# Altium PCB SQUIDCtr_Rev1.PcbDoc (part 2 of 4)
Units mil, origin at the board's own origin, x right, y up, seen from the top; angles counter-clockwise.
Board outline 5863.43 x 2940 mil, 6 copper layers (Top Layer, Internal Plane 1, Mid-Layer 1, InternalPlane 2, Mid-Layer 2, Bottom Layer), stack 62.5 mil thick; 614 components, 341 nets, 1601 pads, 475 vias.
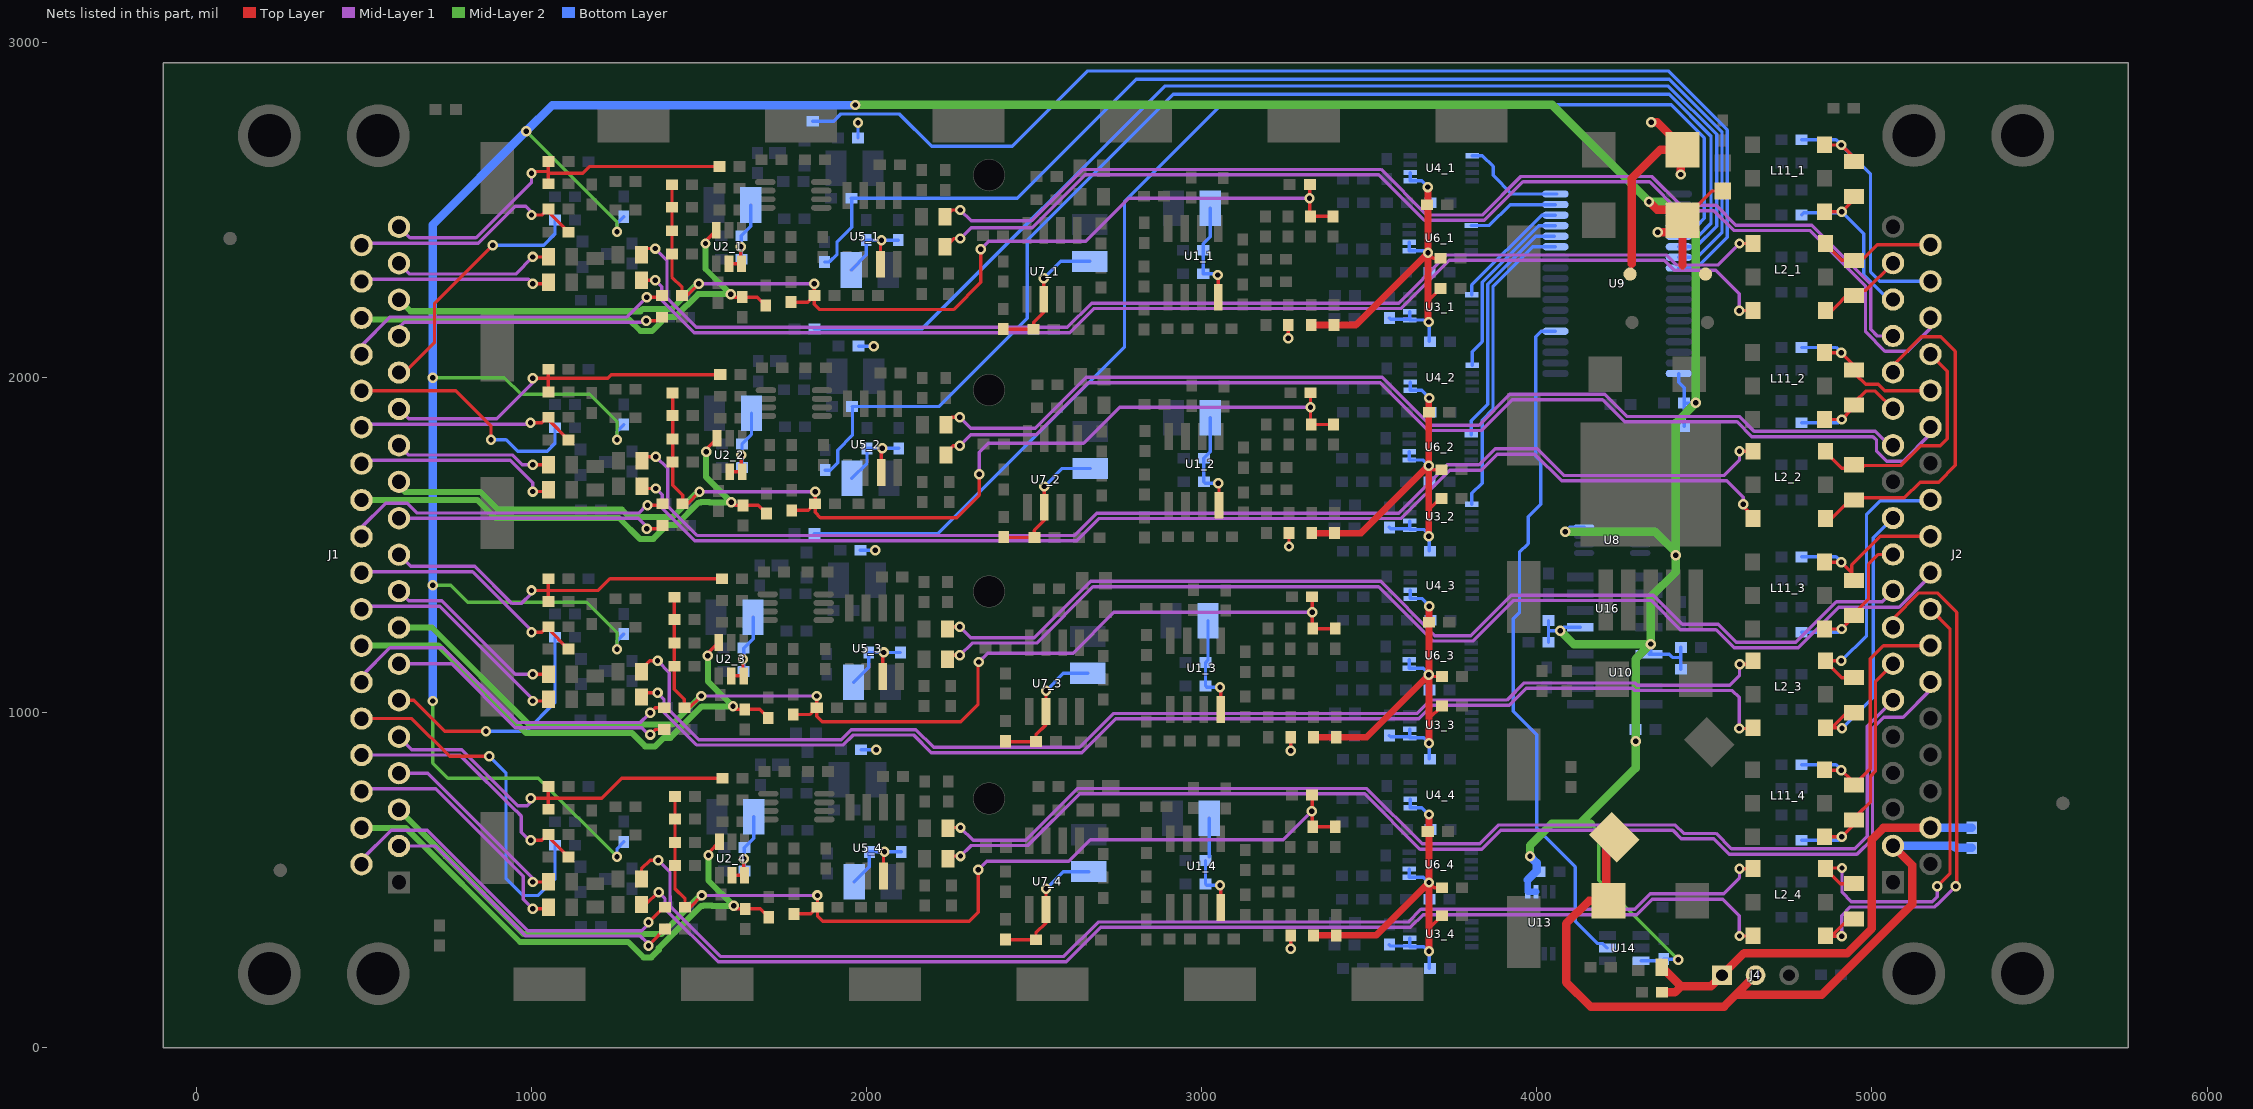
[diagram p6: the nets of this part, all layers, seen from the top]

## Components (designator, comment, footprint, x,y, rotation, side; value= is the part's Value field where it differs from the comment) (continued)
U6_4 "DAC8571IDGKR" MSOP-8 3619.5,509 r0 bottom (schematic designator U6)
U7_1 "REF43" SO8#1 2479,2234 r90 top (schematic designator U7)
U7_2 "REF43" SO8#1 2481,1613 r90 top (schematic designator U7)
U7_3 "REF43" SO8#1 2486,1004 r90 top (schematic designator U7)
U7_4 "REF43" SO8#1 2486,413 r90 top (schematic designator U7)
U8 "P82B96DP,118" MSOP8-P82B96 4225,1515 r180 bottom
U9 "MAX7300AAX+" SOP36Body15.4mmx7.5mm 4240,2280 r0 bottom
U10 "DS90C401M/NOPB" SO8#2 4335,1175 r180 bottom
U11_1 "ISL28118FUZ" MSOP8-P82B96 1782,2545 r180 top (schematic designator U11)
U11_2 "ISL28118FUZ" MSOP8-P82B96 1784,1924 r180 top (schematic designator U11)
U11_3 "ISL28118FUZ" MSOP8-P82B96 1789,1315 r180 top (schematic designator U11)
U11_4 "ISL28118FUZ" MSOP8-P82B96 1791,720 r180 top (schematic designator U11)
U12 "LT3080" D2-PAK-6_LT3080 4340,1555 r90 top
U13 "DAC8571IDGKR" MSOP-8 3973,466 r270 bottom
U14 "AD7414ARTZ-0500RL7" SOT23-6 4311,298 r270 bottom
U16 "DS90C402M/NOPB" SO8#2 4130,1255 r0 bottom

## Footprints (in the part's own frame and the unit in brackets; to place one, negate y for a bottom-side part, rotate by r counter-clockwise, add the part's x,y. Pads: shape width x height; smd on the part's side, far side on the other; paste and mask are expansions set on the pad)
0603 [mil]
  rect 36x32 smd: 1(0,0) 2(60,0)
  silkscreen extent -31,-30 90,30
0805 [mil]
  rect 38.5x52 smd: 1(0,0) 2(70,0)
  silkscreen extent -31,-38 101,38
0805L [mil]
  rect 50x50 smd: 1(-0.4,0.18) 2(83.6,0.18)
  silkscreen extent 31,-20 52,20
1206 [mil]
  rect 45x60 smd: 1(0,0) 2(105,0)
  silkscreen extent -37,-51 144,51
CC3225-1210 [mm]
  rect 1.6x2.7 smd: 1(-1.4,0) 2(1.4,0)
  silkscreen extent -0.3,-1.25 0.3,1.25
D2-PAK-6_LT3080 [mm] "D2-PAK, 6-Pads, Body 9.4x10.5mm (max), IPC Medium Density"
  rect 4.6x1.1 smd: 1(-5.55,3.404) 2(-5.55,1.702) 3(-5.55,0) 4(-5.55,-1.702) 5(-5.55,-3.404)
  rect 9.4x10.672 smd: 6(3.2,0)
  silkscreen extent -5.67,-5.25 -1.9,5.25, body extent -3.9,-5.28 5.5,5.27, height 4.57
"DSUB37-F (590MILS)" [mm] "DSUB 37Pin Female - 590mils from board edge to first pin"
  rect 1.69x1.69 hole 1.09: 1(-16.566,-10.92)
  round 1.69 hole 1.09: 2(-13.806,-10.92) 3(-11.046,-10.92) 4(-8.286,-10.92) 5(-5.526,-10.92) 6(-2.766,-10.92) 7(-0.006,-10.92) 8(2.754,-10.92) 9(5.514,-10.92) 10(8.274,-10.92) 11(11.034,-10.92) 12(13.794,-10.92) 13(16.554,-10.92) 14(19.314,-10.92) 15(22.074,-10.92) 16(24.834,-10.92) 17(27.594,-10.92) 18(30.354,-10.92) 19(33.114,-10.92) 20(-15.187,-8.08) 21(-12.427,-8.08) 22(-9.667,-8.08) 23(-6.907,-8.08) 24(-4.147,-8.08) 25(-1.387,-8.08) 26(1.373,-8.08) 27(4.133,-8.08) 28(6.893,-8.08) 29(9.653,-8.08) 30(12.413,-8.08) 31(15.173,-8.08) 32(17.933,-8.08) 33(20.693,-8.08) 34(23.453,-8.08) 35(26.213,-8.08) 36(28.973,-8.08) 37(31.733,-8.08)
  round 4.76 hole 3.26: 38(-23.476,-1.095) 38(-23.476,-9.348) 39(40.024,-1.095) 39(40.024,-9.348)
  silkscreen extent -26.5,-12.5 43.15,12.91
"DSUB37-M (590MILS)" [mm] "DSUB 37Pin Male - 590mils from board edge to first pin"
  rect 1.69x1.69 hole 1.09: 1(33.112,-10.92)
  round 1.69 hole 1.09: 2(30.352,-10.92) 3(27.592,-10.92) 4(24.832,-10.92) 5(22.072,-10.92) 6(19.312,-10.92) 7(16.552,-10.92) 8(13.792,-10.92) 9(11.032,-10.92) 10(8.272,-10.92) 11(5.512,-10.92) 12(2.752,-10.92) 13(-0.008,-10.92) 14(-2.768,-10.92) 15(-5.528,-10.92) 16(-8.288,-10.92) 17(-11.048,-10.92) 18(-13.808,-10.92) 19(-16.568,-10.92) 20(31.733,-8.08) 21(28.973,-8.08) 22(26.213,-8.08) 23(23.453,-8.08) 24(20.693,-8.08) 25(17.933,-8.08) 26(15.173,-8.08) 27(12.413,-8.08) 28(9.653,-8.08) 29(6.893,-8.08) 30(4.133,-8.08) 31(1.373,-8.08) 32(-1.387,-8.08) 33(-4.147,-8.08) 34(-6.907,-8.08) 35(-9.667,-8.08) 36(-12.427,-8.08) 37(-15.187,-8.08)
  round 4.76 hole 3.26: 38(40.024,-9.348) 38(40.024,-1.095) 39(-23.476,-9.348) 39(-23.476,-1.095)
  silkscreen extent -26.5,-12.5 43.15,12.91
ELLATV [mm] "Inductor"
  rect 2.45x3 smd rot 45: 1(-3.6,-3.6) 2(3.6,3.6)
  silkscreen extent -5.5,-5.5 5.5,5.5
Fiducial_mark [mil]
  round 40 smd mask+20: 0(0,0)
  round 40 smd far side mask+20: 1(0,0)
HDR1X3_MolexVertical [mm] "WM2889"
  rect 1.5x1.5 hole 0.889: 1(0,0)
  round 1.5 hole 0.889: 2(2.54,0) 3(5.08,0)
  silkscreen extent -2.54,-3.02 7.62,1.73
MSOP8-P82B96 [mm] "TSOP, 8-Leads, Body 3.1x3.1mm (max), Pitch 0.65mm, IPC Medium Density"
  oval 1.55x0.45 smd: 1(-2.125,0.975) 2(-2.125,0.325) 3(-2.125,-0.325) 4(-2.125,-0.975) 5(2.125,-0.975) 6(2.125,-0.325) 7(2.125,0.325) 8(2.125,0.975)
  silkscreen extent -2.25,-1.55 0.95,1.87, body extent -1.55,-1.55 1.55,1.55, height 1.1
MSOP-8 [mil]
  rect 40x16 smd: 1(0,0) 2(0,-25) 3(0,-50) 4(0,-75) 5(185,-75) 6(185,-50) 7(185,-25) 8(185,0)
  silkscreen extent -3,-100 150,26
"SHIELD BASE" [mil]
  rect 215x100 smd: 1(500,25)
  silkscreen extent 120,-12 380,13
"SHIELD BASE CORNER" [mil]
  rect 100x215 smd: 1(156,-381)
  silkscreen extent 118,-260 144,13
SO8#1 [mil]
  round 10 on Top Overlay: 0(-40,40)
  rect 80x26 smd: 1(0,0) 2(0,-50) 3(0,-100) 4(0,-150) 5(205,-150) 6(205,-100) 7(205,-50) 8(205,0)
  silkscreen extent -53,-180 258,30
SO8#2 [mil]
  round 10 on Bottom Overlay: 0(-40,40)
  rect 80x26 smd: 1(0,0) 2(0,-50) 3(0,-100) 4(0,-150) 5(205,-150) 6(205,-100) 7(205,-50) 8(205,0)
  silkscreen extent -53,-180 258,30
SOP36Body15.4mmx7.5mm [mm] "SOP, 36-Leads, Body 15.38x7.50mm, Pitch 0.80mm, IPC Medium Density"
  oval 2x0.55 smd: 1(-4.675,6.8) 2(-4.675,6) 3(-4.675,5.2) 4(-4.675,4.4) 5(-4.675,3.6) 6(-4.675,2.8) 7(-4.675,2) 8(-4.675,1.2) 9(-4.675,0.4) 10(-4.675,-0.4) 11(-4.675,-1.2) 12(-4.675,-2) 13(-4.675,-2.8) 14(-4.675,-3.6) 15(-4.675,-4.4) 16(-4.675,-5.2) 17(-4.675,-6) 18(-4.675,-6.8) 19(4.675,-6.8) 20(4.675,-6) 21(4.675,-5.2) 22(4.675,-4.4) 23(4.675,-3.6) 24(4.675,-2.8) 25(4.675,-2) 26(4.675,-1.2) 27(4.675,-0.4) 28(4.675,0.4) 29(4.675,1.2) 30(4.675,2) 31(4.675,2.8) 32(4.675,3.6) 33(4.675,4.4) 34(4.675,5.2) 35(4.675,6) 36(4.675,6.8)
  silkscreen extent -4.8,-7.8 3.27,7.8, body extent -3.8,-7.8 3.8,7.8, height 2.65
SOT23 [mil]
  rect 36x36 smd: 1(-38,-80) 2(37,-80)
  rect 36x50 smd: 3(0,0)
  silkscreen extent -58,-85 57,5
SOT23-6 [mil]
  rect 26x50 smd: 1(-37.5,0) 2(0,0) 3(37.5,0) 4(37.5,100) 5(0,100) 6(-37.5,100)
  silkscreen extent -83,-8 65,100
SRR4028 [mm]
  round 1 smd: 1(-2.02,1.912) 2(-1.87,-1.749)
  Top Layer region: 1.8,-0.751 2.651,-0.751 2.65,-2.751 -2.649,-2.752 -2.648,-0.752 -1.8,-0.752 -1.636,-0.751 -1.558,-0.901 -1.474,-1.033 -1.378,-1.158 -1.273,-1.273 -1.157,-1.38 -1.032,-1.476 -0.901,-1.56 -0.76,-1.633 -0.616,-1.692 -0.465,-1.74 -0.312,-1.774 -0.157,-1.794 0.001,-1.801 0.157,-1.795 0.313,-1.773 0.466,-1.739 0.617,-1.692 0.761,-1.632 0.901,-1.56 1.033,-1.476 1.158,-1.38 1.273,-1.274 1.38,-1.158 1.475,-1.034 1.559,-0.901 1.632,-0.763 1.636,-0.751 1.801,-0.751
  Top Layer region: -1.8,0.75 -2.65,0.75 -2.65,2.75 2.65,2.75 2.649,0.751 1.8,0.751 1.637,0.75 1.559,0.9 1.475,1.032 1.378,1.157 1.273,1.272 1.158,1.379 1.033,1.475 0.901,1.559 0.761,1.631 0.616,1.691 0.466,1.739 0.313,1.773 0.157,1.793 0,1.8 -0.156,1.793 -0.312,1.772 -0.466,1.738 -0.616,1.691 -0.761,1.631 -0.9,1.559 -1.033,1.474 -1.157,1.379 -1.273,1.273 -1.379,1.157 -1.475,1.033 -1.559,0.9 -1.631,0.762 -1.636,0.75 -1.8,0.75
TCASE-D [mm]
  rect 2.55x2.7 smd: 1(0,0) 2(6.35,0)
  silkscreen extent -1.9,-2.54 8.26,2.54
TTWB [mil] "Transformer"
  round 10 on Top Overlay: 1(-44,-3)
  rect 50x44.88 smd: 1(0,0) 2(100,0) 3(200,0) 4(200,215) 5(100,215) 6(0,215)
  silkscreen extent -35,-33 235,248

## Part data
C1 C2 C3_1 C3_2 C3_3 C3_4 C4 C5_1 C5_2 C5_3 C5_4 C6_1 C6_2 C6_3 C6_4 C7_1 C7_2 C7_3 C7_4 C8_1 C8_2 C8_3 C8_4 C9_1 C9_2 C9_3 C9_4 C10 C11_1 C11_2 C11_3 C11_4 C12_1 C12_2 C12_3 C12_4 C13_1 C13_2 C13_3 C13_4 C14_1 C14_2 C14_3 C14_4 C15_1 C15_2 C15_3 C15_4 C16_1 C16_2 C16_3 C16_4 C17_1 C17_2 C17_3 C17_4 C18_1 C18_2 C18_3 C18_4 C19_1 C19_2 C19_3 C19_4 C20_1 C20_2 C20_3 C20_4 C21_1 C21_2 C21_3 C21_4 C22 C23_1 C23_2 C23_3 C23_4 C26_1 C26_2 C26_3 C26_4 C30 C31 C32 C35_1 C35_2 C35_3 C35_4 C36_1 C36_2 C36_3 C36_4 C37_1 C37_2 C37_3 C37_4 C39_1 C39_2 C39_3 C39_4 C40_1 C40_2 C40_3 C40_4 C41_1 C41_2 C41_3 C41_4 C42_1 C42_2 C42_3 C42_4 C43_1 C43_2 C43_3 C43_4 C44 C45_1 C45_2 C45_3 C45_4 C46_1 C46_2 C46_3 C46_4 C47_1 C47_2 C47_3 C47_4 C48_1 C48_2 C48_3 C48_4 C49_1 C49_2 C49_3 C49_4 C50_1 C50_2 C50_3 C50_4 C51_1 C51_2 C51_3 C51_4 C52_1 C52_2 C52_3 C52_4 C53_1 C53_2 C53_3 C53_4 C54_1 C54_2 C54_3 C54_4 C55 C56 C57 C58_1 C58_2 C58_3 C58_4 C59_1 C59_2 C59_3 C59_4 C60_1 C60_2 C60_3 C60_4 C61_1 C61_2 C61_3 C61_4 C62_1 C62_2 C62_3 C62_4 C67_1 C67_2 C67_3 C67_4 C68_1 C68_2 C68_3 C68_4 C69_1 C69_2 C69_3 C69_4: library part Cap0603, "Capacitor, Ceramic, 0603"
C24 C25 C27 C28 C29: library part Tantalum, "CAP TANT CASE-D"
C38_1 C38_2 C38_3 C38_4 C63_1 C63_2 C63_3 C63_4 C64_1 C64_2 C64_3 C64_4 C65_1 C65_2 C65_3 C65_4 C66_1 C66_2 C66_3 C66_4: library part "CAP 1210", "Capacitor, Ceramic, 1210"
DP1: library part "LED, yellow, 0805, 2mA", "LED"
J1: "DB37F"
J2: "DB37M"
J4: library part "Header 3", "3-Pin 0.1\" header"
L1_1 L1_2 L1_3 L1_4 L9_1 L9_2 L9_3 L9_4: library part Inductor0603, "Inductor 0603"
L3: "33uH 1.8A inductor 10mmx10mm"
L4 L7_1 L7_2 L7_3 L7_4 L8_1 L8_2 L8_3 L8_4: library part Inductor0603, "Inductor 0805"
L5 L6: library part InductorSRR4028, "=PartConstraints"
L11_1 L11_2 L11_3 L11_4: library part Transformer, "Transformer"
Q1_1 Q1_2 Q1_3 Q1_4: library part 2N2222, "TRANS NPN 40V 350MW SMD SOT23-3"
Q2_1 Q2_2 Q2_3 Q2_4: library part BC849_850, "TRANSISTOR NPN 30V 100MA SOT23"
R1_1 R1_2 R1_3 R1_4 R2_1 R2_2 R2_3 R2_4 R3_1 R3_2 R3_3 R3_4 R5_1 R5_2 R5_3 R5_4 R10_1 R10_2 R10_3 R10_4 R55_1 R55_2 R55_3 R55_4 R57_1 R57_2 R57_3 R57_4: library part "RES 0805", "RES 0805 SMD"
R4_1 R4_2 R4_3 R4_4 R35_1 R35_2 R35_3 R35_4: library part "RES 1206", "RES 100 OHM 1/4W 1206 SMD"
R6_1 R6_2 R6_3 R6_4 R7_1 R7_2 R7_3 R7_4 R9_1 R9_2 R9_3 R9_4 R16 R17 R18 R42 R43_1 R43_2 R43_3 R43_4 R46_1 R46_2 R46_3 R46_4 R47_1 R47_2 R47_3 R47_4 R50_1 R50_2 R50_3 R50_4 R64_1 R64_2 R64_3 R64_4 R65_1 R65_2 R65_3 R65_4 R66 R68 R73 R75 R76: library part "RES 0603", "RES 0603"
R8_1 R8_2 R8_3 R8_4 R11_1 R11_2 R11_3 R11_4 R12_1 R12_2 R12_3 R12_4 R13_1 R13_2 R13_3 R13_4 R14_1 R14_2 R14_3 R14_4 R15 R19_1 R19_2 R19_3 R19_4 R20_1 R20_2 R20_3 R20_4 R21_1 R21_2 R21_3 R21_4 R22_1 R22_2 R22_3 R22_4 R23_1 R23_2 R23_3 R23_4 R24_1 R24_2 R24_3 R24_4 R25_1 R25_2 R25_3 R25_4 R26_1 R26_2 R26_3 R26_4 R27_1 R27_2 R27_3 R27_4 R28_1 R28_2 R28_3 R28_4 R29_1 R29_2 R29_3 R29_4 R30_1 R30_2 R30_3 R30_4 R31_1 R31_2 R31_3 R31_4 R32 R33_1 R33_2 R33_3 R33_4 R34_1 R34_2 R34_3 R34_4 R36_1 R36_2 R36_3 R36_4 R37_1 R37_2 R37_3 R37_4 R38_1 R38_2 R38_3 R38_4 R39_1 R39_2 R39_3 R39_4 R40_1 R40_2 R40_3 R40_4 R41_1 R41_2 R41_3 R41_4 R44_1 R44_2 R44_3 R44_4 R45_1 R45_2 R45_3 R45_4 R48_1 R48_2 R48_3 R48_4 R49_1 R49_2 R49_3 R49_4 R51_1 R51_2 R51_3 R51_4 R52_1 R52_2 R52_3 R52_4 R53_1 R53_2 R53_3 R53_4 R54_1 R54_2 R54_3 R54_4 R56_1 R56_2 R56_3 R56_4 R58_1 R58_2 R58_3 R58_4 R59_1 R59_2 R59_3 R59_4 R60_1 R60_2 R60_3 R60_4 R61_1 R61_2 R61_3 R61_4 R62_1 R62_2 R62_3 R62_4 R63_1 R63_2 R63_3 R63_4 R67 R69_1 R69_2 R69_3 R69_4 R70_1 R70_2 R70_3 R70_4 R71_1 R71_2 R71_3 R71_4 R72_1 R72_2 R72_3 R72_4 R74_1 R74_2 R74_3 R74_4 R77_1 R77_2 R77_3 R77_4 R78_1 R78_2 R78_3 R78_4 R79_1 R79_2 R79_3 R79_4 R80_1 R80_2 R80_3 R80_4 R81_1 R81_2 R81_3 R81_4 R82_1 R82_2 R82_3 R82_4 R85: library part Res0603, "RES 0603"
SH1 SH2 SH3 SH4 SH5 SH6 SH8 SH9 SH10 SH11 SH12 SH13 SH14 SH16 SH17 SH18 SH19 SH20 SH21 SH22 SH23 SH24: library part ShieldBase
U1_1 U1_2 U1_3 U1_4: library part LMH6628, "IC OP AMP DUAL 2CH LN 8-SOIC"
U2_1 U2_2 U2_3 U2_4: "IC OPAMP R-R I/O 800MHZ SOT-23-6"
U3_1 U3_2 U3_3 U3_4 U4_1 U4_2 U4_3 U4_4 U6_1 U6_2 U6_3 U6_4 U13: "IC DAC 16BIT I2C V-OUT LP 8-MSOP"
U5_1 U5_2 U5_3 U5_4: "IC AMP DIFF LDIST LP 95MA 8SOIC"
U7_1 U7_2 U7_3 U7_4: "Voltage Referance"
U8: library part P82B96, "IC DUAL BI-DIR BUS BUFFER 8-TSSOP"
U9: "IO expander 28 IOs, I2C"
U10: "IC DRV LVDS DUAL DIFF SGNL 8SOIC"
U11_1 U11_2 U11_3 U11_4: "IC OPAMP PREC R-R 4MHZ LP 8MSOP"
U12: "Low dropout regulator, single resistor, 1.1A"
U14: "Digital Temperature Sensor, 11-Bit, +/-2 Degree Accurate"
U16: "IC REC LVDS DUAL DIFF SGNL 8SOIC"

## Free pads (board coordinates)
  round 96 hole 93 unplated: 1(2366,744) 1(2366,1362) 1(2366,1963) 1(2366,2604)

## Via types
v1: diameter 31, hole 16, Top Layer to Bottom Layer, tented both sides, 475 vias

## Nets (pads, with @x,y where several pads share a name; then routed paths per layer and width w, separated by ;. In a path a pad name is that pad's centre, name@x,y a point inside that pad or via, vN(x,y) a via of type N, cw(c..) or ccw(c..) an arc to the next point about the centre after c; other vN are vias at no path point)
5V5_RAW: C24.1 J2.2 J4.2 L3.1 R18.1 | length 2237.8
  Top Layer w25: L3.1@4231.27,628.27 4207,604 4207,446 C24.1@4214,439 4156,439 4088,371 4088,196 4161,123 4559,123 4595,159 ; J4.2@4653,217 4595,159 ; J2.2@5063.08,602.87 5120,545.95 5120,428 4851,159 4595,159
  Bottom Layer w25: J2.2@5063.08,602.87 5244.13,602.87 5250,597 R18.1@5298,597
5VA: C5_1.2 C5_2.2 C5_3.2 C5_4.2 C6_1.2 C6_2.2 C6_3.2 C6_4.2 C18_1.2 C18_2.2 C18_3.2 C18_4.2 C20_1.2 C20_2.2 C20_3.2 C20_4.2 C21_1.2 C21_2.2 C21_3.2 C21_4.2 C27.1 C39_1.2 C39_2.2 C39_3.2 C39_4.2 C41_1.2 C41_2.2 C41_3.2 C41_4.2 C42_1.2 C42_2.2 C42_3.2 C42_4.2 C63_1.2 C63_2.2 C63_3.2 C63_4.2 C64_1.2 C64_2.2 C64_3.2 C64_4.2 C65_1.2 C65_2.2 C65_3.2 C65_4.2 C66_1.2 C66_2.2 C66_3.2 C66_4.2 L5.2 R12_1.1 R12_2.1 R12_3.1 R12_4.1 R61_1.2 R61_2.2 R61_3.2 R61_4.2 U1_1.8 U1_2.8 U1_3.8 U1_4.8 U2_1.5 U2_1.6 U2_2.5 U2_2.6 U2_3.5 U2_3.6 U2_4.5 U2_4.6 U5_1.3 U5_2.3 U5_3.3 U5_4.3 U7_1.2 U7_2.2 U7_3.2 U7_4.2 | length 5957.2
  Top Layer w10: U2_1.5@1590,2340 U2_1.6@1627.5,2340 1625,2342.5 v1(1625,2390) ; U2_2.5@1592,1719 U2_2.6@1629.5,1719 1627,1721.5 v1(1627,1769) ; U2_3.5@1597,1110 U2_3.6@1634.5,1110 1632,1112.5 v1(1632,1160) ; U2_4.5@1599,515 U2_4.6@1636.5,515 1634,517.5 v1(1634,565) ; U5_1.3@2042,2338 v1@2042,2407 ; U5_2.3@2044,1717 v1@2044,1786 ; U5_3.3@2049,1108 v1@2049,1177 ; U5_4.3@2051,513 v1@2051,582 ; C21_1.2@2408,2145 2409,2144 C18_1.2@2499,2144 2499,2165 2529,2195 U7_1.2@2529,2234 v1(2529,2296) ; C21_2.2@2410,1524 2411,1523 C18_2.2@2501,1523 2501,1544 2531,1574 U7_2.2@2531,1613 v1(2531,1675) ; C21_4.2@2415,324 2416,323 C18_4.2@2506,323 2506,344 2536,374 U7_4.2@2536,413 v1(2536,475) ; C21_3.2@2415,915 2416,914 C18_3.2@2506,914 2506,935 2536,965 U7_3.2@2536,1004 v1(2536,1066) ; v1(3048,2306) 3050,2304 U1_1.8@3050,2240 ; v1(3050,1685) 3052,1683 U1_2.8@3052,1619 ; v1(3055,485) 3057,483 U1_4.8@3057,419 ; v1(3055,1076) 3057,1074 U1_3.8@3057,1010 ; v1(3259,2117) R12_1.1@3259,2157 ; v1(3261,1496) R12_2.1@3261,1536 ; v1(3266,296) R12_4.1@3266,336 ; v1(3266,887) R12_3.1@3266,927
  Top Layer w25: 4283,2339 4283,2594 4369,2680 C27.1@4435,2680 ; v1(4342,2761.63) 4360,2761.63 4375,2746.63 ; 4365,2756.63 C27.1@4426.63,2695 ; v1(4430,2605.99) C27.1@4430,2650.99
  Bottom Layer w10: C5_1.2@1627,2353 C6_1.2@1627,2423 1655.12,2451.12 C63_1.2@1655.12,2515 ; C5_2.2@1629,1732 C6_2.2@1629,1802 1657.12,1830.12 C63_2.2@1657.12,1894 ; C5_3.2@1634,1123 C6_3.2@1634,1193 1662.12,1221.12 C63_3.2@1662.12,1285 ; C5_4.2@1636,528 C6_4.2@1636,598 1664.12,626.12 C63_4.2@1664.12,690 ; C64_1.2@1954.88,2321 2000,2366.12 C42_1.2@2000,2410 v1(2045,2410) C41_1.2@2095,2410 ; C64_2.2@1956.88,1700 2002,1745.12 C42_2.2@2002,1789 v1(2047,1789) C41_2.2@2097,1789 ; C64_3.2@1961.88,1091 2007,1136.12 C42_3.2@2007,1180 v1(2052,1180) C41_3.2@2102,1180 ; C64_4.2@1963.88,496 2009,541.12 C42_4.2@2009,585 v1(2054,585) C41_4.2@2104,585 ; R61_1.2@1975,2715 v1(1975,2760) ; R61_2.2@1977,2094 v1(2022,2094) ; R61_3.2@1982,1485 v1(2027,1485) ; R61_4.2@1984,890 v1(2029,890) ; v1(2529,2296) 2579.88,2346.88 C66_1.2@2666,2346.88 ; v1(2531,1675) 2584.88,1728.88 C66_2.2@2668,1728.88 ; v1(2536,475) 2586.88,525.88 C66_4.2@2664,525.88 ; v1(2536,1066) 2587.88,1117.88 C66_3.2@2661,1117.88 ; C39_4.2@3012,559 C20_4.2@3012,489 3016,485 v1(3055,485) ; C65_3.2@3019.12,1275 3019.12,1157.12 C39_3.2@3012,1150 C20_3.2@3012,1080 3016,1076 v1(3055,1076) ; C39_4.2@3023.12,570.12 C65_4.2@3023.12,685 ; C65_2.2@3026.12,1880 3026.12,1778.12 C39_2.2@3007,1759 C20_2.2@3007,1689 3011,1685 v1(3050,1685) ; C65_1.2@3026.12,2505 3026.12,2420.12 3005,2399 C39_1.2@3005,2380 C20_1.2@3005,2310 3044,2310 v1(3048,2306)
5VD: C1.2 C2.2 C10.2 C22.2 C29.1 C30.2 C31.2 C32.2 C44.2 DP1.1 L6.2 R63_1.1 R63_2.1 R63_3.1 R63_4.1 R67.2 U8.8 U9.36 U10.1 U13.1 U13.2 U14.3 U16.1 | length 13002.6
  Top Layer w10: C29.1@4435,2470 4521.6,2556.6 DP1.1@4554.82,2556.6
  Top Layer w25: v1(4335,2525) 4359,2501 4404,2501 C29.1@4435,2470 ; v1(4361,2434) 4399,2434 C29.1@4435,2470 ; 4435,2335 C29.1@4435,2470
  Mid-Layer 2 w10: v1(706.57,1035) 706.57,850 751.57,805 1021,805 v1(1256,570) ; v1(706.57,1380) 760,1380 810,1330 1165,1330 1256,1239 v1(1256,1190) ; v1(706.57,2000) 920,2000 970,1950 1175,1950 1256,1869 v1(1256,1815) ; v1(985,2735) 1256,2464 v1(1256,2435) ; 4161,669 4185,645 4185,500 v1(4422,263)
  Mid-Layer 2 w25: v1@1973,2814 4046,2814 v1(4335,2525) 4385,2525 4475,2435 v1(4475,1925) 4415,1865 v1@4415,1478.08 ; v1(3980,572) 3980,604 4045,669 4161,669 ; v1(4070,1245) 4110,1205 v1(4340,1205) ; v1(4085,1540) 4353.08,1540 v1@4415,1478.08 ; 4129,669 4295,835 4295,1160 v1(4340,1205) ; v1(4340,1205) 4340,1345.25 4415,1420.25 v1(4415,1470) v1@4415,1478.08
  Bottom Layer w10: v1(1256,570) 1256,595 R63_4.1@1276,615 ; v1(1256,1190) 1256,1215 R63_3.1@1276,1235 ; v1(1256,1815) 1256,1840 R63_2.1@1276,1860 ; v1(1256,2435) 1256,2460 R63_1.1@1276,2480 ; C44.2@4035,1210 4035,1245 ; C10.2@4035,1275 4035,1245 ; v1(4085,1540) 4098.39,1553.39 U8.8@4141.34,1553.39 ; U16.1@4130,1255 4080,1255 v1(4070,1245) 4035,1245 ; v1(4295,915) R67.2@4295,950 ; U14.3@4311,260.5 4374.5,260.5 C30.2@4379,265 4410,265 4412,263 v1(4422,263) ; v1(4340,1205) 4340,1180 U10.1@4335,1175 4395,1175 4405,1165 4430,1165 ; U9.36@4424.06,2012.28 4424.06,1985.94 4440,1970 C32.2@4440,1924 ; C2.2@4430,1130 4430,1165 ; C1.2@4430,1195 4430,1165 ; C31.2@4440,1854 C32.2@4440,1924 ; v1(4475,1925) 4474,1924 C32.2@4440,1924
  Bottom Layer w20: 3973,501 U13.1@3973,466 U13.2@3998,466
  Bottom Layer w25: v1(706.57,1035) v1(706.57,1380) v1(706.57,2000) 706.57,2456.57 v1(985,2735) 1063.04,2813.04 v1@1961.04,2813.04 ; 3973,501 4000,528 4000,552 v1(3980,572)
  other v1: 1967,2813.5
6V5_RAW: C4.2 J2.21 J4.1 L4.2 R18.2 | length 1372.2
  Top Layer w25: L4.2@4373,241 4430,184 ; C4.2@4374,166 4412,166 4430,184 ; J2.21@5168.89,653 J2.21@5172.53,656.64 ; J2.21@5174.89,656.64 J2.21@5172.53,656.64 ; J2.21@5174.89,659 J2.21@5172.53,656.64 ; 4430,184 4520,184 4619,283 4926.7,283 5000,356.3 5000,622.36 5034.28,656.64 J2.21@5172.53,656.64
  Bottom Layer w25: J2.21@5174.89,657.17 5175.05,657 R18.2@5298,657
ALERT: U9.5 U14.5 | length 2055.7
  Bottom Layer w10: U9.5@4055.94,2138.27 4013.27,2138.27 3997.5,2122.5 3997.5,1765.13 4012.5,1750.13 4012.5,1622.13 3975,1584.63 3975,1505 3948.5,1478.5 3948.5,1298.5 3930,1280 3930,1005 4000,935 4000,655 4115,540 4115,377.94 4181.44,311.5 4197.5,311.5 U14.5@4211,298
CARRIER_1_N: L2_1.3 R10_1.1 | length 3595.9
  Top Layer w10: R10_1.1@1321,2290 v1(1370,2290) ; v1(4604,2200) L2_1.3@4649,2200
  Mid-Layer 1 w10: v1(1370,2290) 1389,2271 1389,2231 1486,2134 2606.63,2134 2678.63,2206 3594.63,2206 3738.63,2350 4380.37,2350 4410.37,2320 4534,2320 4604,2250 v1@4604,2201
CARRIER_1_P: L2_1.1@4646,2400 R2_1.1 | length 3625.1
  Top Layer w10: R2_1.1@1321,2360 1346,2385 v1@1364,2385 ; v1(4605,2400) L2_1.1@4650,2400
  Mid-Layer 1 w10: v1(1370,2385) 1405,2350 1405,2237.63 1492.63,2150 2600,2150 2672,2222 3588,2222 3732,2366 4387,2366 4417,2336 4540.63,2336 4540.81,2335.81 v1(4605,2400)
CARRIER_2_N: L2_2.3 R10_2.1 | length 3621
  Top Layer w10: R10_2.1@1323,1669 v1(1372,1669) ; v1(4616,1622) 4616,1616 L2_2.3@4652,1580
  Mid-Layer 1 w10: v1(1372,1669) 1391,1650 1391,1610 1488,1513 2627.63,1513 2694.31,1579.69 3595.69,1579.69 3740,1724 3834.63,1724 3882.31,1771.69 3994.31,1771.69 4074,1692 4566.63,1692 4566.81,1692.19 4616,1643 v1(4616,1622) v1@4617,1621
CARRIER_2_P: L2_2.1@4646,1780 R2_2.1 | length 3682.3
  Top Layer w10: R2_2.1@1323,1739 1348,1764 v1@1366,1764 ; v1(4605,1780) L2_2.1@4646,1780 L2_2.1@4652,1780
  Mid-Layer 1 w10: v1(1372,1764) 1407,1729 1407,1616.63 1494.63,1529 2621,1529 2687.69,1595.69 3589.06,1595.69 3733.37,1740 3828,1740 3875.69,1787.69 4000.94,1787.69 4080.63,1708 4560,1708 4605,1753 v1(4605,1780)
CARRIER_3_N: L2_3.3 R10_3.1 | length 3627.7
  Top Layer w10: R10_3.1@1328,1060 v1(1377,1060) ; v1(4604,953) 4650,953 L2_3.3@4652,955
  Mid-Layer 1 w10: v1(1377,1060) 1396,1041 1396,1001 1493,904 1931.63,904 1961.31,933.69 2141.31,933.69 2194,881 2642.63,881 2743.31,981.69 3648.69,981.69 3689,1022 3918,1022 3969,1073 4286,1073 4292.69,1066.31 4583.69,1066.31 4604,1046 v1@4604,956
CARRIER_3_P: L2_3.1@4646,1155 R2_3.1 | length 3667.1
  Top Layer w10: R2_3.1@1328,1130 1353,1155 v1@1371,1155 ; v1(4606,1145) 4642,1145 L2_3.1@4652,1155
  Mid-Layer 1 w10: v1(1377,1155) 1412,1120 1412,1007.63 1499.63,920 1925,920 1954.69,949.69 2147.94,949.69 2200.63,897 2636,897 2736.69,997.69 3642.06,997.69 3682.37,1038 3911.37,1038 3962.37,1089 4292.63,1089 4299.31,1082.31 4576.6,1082.31 4605,1110.72 v1@4605,1155
CARRIER_4_N: L2_4.3 R10_4.1 | length 3597.2
  Top Layer w10: R10_4.1@1329,428 1342,428 v1@1379,465 ; v1(4605,334) 4651,334 L2_4.3@4652,335
  Mid-Layer 1 w10: v1(1380,465) 1399,446 1399,416 1558,257 2596,257 2698.69,359.69 3623.31,359.69 3661.31,397.69 4298.69,397.69 4345,444 4555,444 4604,395 v1@4604,336
CARRIER_4_P: L2_4.1@4646,535 R2_4.1 | length 3656.3
  Top Layer w10: R2_4.1@1329,504 1329,534 1355,560 v1@1373,560 ; v1(4605,535) L2_4.1@4652,535
  Mid-Layer 1 w10: v1(1379,560) 1414,525 1414,453.63 1415,452.63 1415,422.63 1564.63,273 2589.37,273 2692.06,375.69 3616.69,375.69 3654.69,413.69 4292.06,413.69 4338.37,460 4553.31,460 ; 4558,460 4605,507 v1(4605,535)
CH1_CRYO.BOLO_N: J1.36 R5_1.1 | length 564.8
  Top Layer w10: v1(1005,2280) 1046,2280 R5_1.1@1051,2285
  Mid-Layer 1 w10: J1.36@493.69,2293 992,2293 v1(1005,2280)
CH1_CRYO.BOLO_P: J1.18 R1_1.1 | length 479.9
  Top Layer w10: v1(1005,2360) R1_1.1@1051,2360
  Mid-Layer 1 w10: J1.18@605.5,2341.04 637.54,2309 954,2309 v1(1005,2360)
CH1_CRYO.HEATER_P: J1.15 R7_1.1 | length 746.5
  Top Layer w10: J1.15@605.5,2015.06 621.63,2015.06 711.57,2105 711.57,2221.57 810,2320 v1(885,2395)
  Bottom Layer w10: v1(885,2395) 1037.5,2395 1071,2428.5 R7_1.1@1071,2470
CH1_CRYO.SQUID_BIAS_N: J1.34 R82_1.1 | length 984.2
  Top Layer w10: v1(1345,2240) 1385,2240 R82_1.1@1390,2245
  Mid-Layer 1 w10: J1.34@493.69,2069.35 493.69,2095.11 579.57,2181 1286,2181 v1(1345,2240)
CH1_CRYO.SQUID_BIAS_P: J1.16 R81_1.2 | length 823.2
  Top Layer w10: v1(1343,2170) 1380,2170 R81_1.2@1390,2180
  Mid-Layer 1 w10: J1.16@605.5,2123.72 605.5,2149.92 620.57,2165 1338,2165 v1(1343,2170)
CH1_CRYO.SQUID_COIL_N: J1.37 R36_1.2 R48_1.1 | length 724.4
  Top Layer w10: v1(1001,2485) 1031,2485 1051,2505 R36_1.2@1051,2503 1051,2495 R48_1.1@1111,2435
  Mid-Layer 1 w10: J1.37@493.69,2395.33 499.35,2401 842,2401 952,2511 984,2511 1001,2494 v1(1001,2485)
CH1_CRYO.SQUID_COIL_P: J1.19 R19_1.2 R28_1.1 R38_1.2 | length 1141.1
  Top Layer w10: v1@1010,2610 1015,2615 1051,2615 ; R19_1.2@1051,2575 R19_1.2@1051,2578 1051,2610 ; R38_1.2@1051,2645 1051,2615 ; R28_1.1@1562,2630 1174.01,2630 1154.01,2610 1051,2610 ; 1051,2610 1051,2615
  Mid-Layer 1 w10: J1.19@605.5,2449.7 638.2,2417 835.37,2417 1001,2582.63 1001,2601 v1@1010,2610
  other v1: 1001,2610
CH1_CRYO.SQUID_SENSE_N: C8_1.2 C9_1.2 C45_1.2 C60_1.2 J1.17 L9_1.1 R30_1.1 R52_1.1 R53_1.2 R56_1.2 R82_1.2 | length 3657
  Top Layer w10: R53_1.2@1420,2369 1420,2300 1450,2270 R82_1.2@1450,2245 1465,2245 v1(1500,2280) ; 1420,2388 C9_1.2@1420,2438 C8_1.2@1420,2508 R30_1.1@1420,2575 ; R56_1.2@1775,2225 1825,2225 R52_1.1@1845,2245 ; v1(1845,2280) R52_1.1@1845,2245 ; v1(2340.83,2383) 2340.83,2283.83 2260,2203 1861,2203 1845,2219 R52_1.1@1845,2245 ; C60_1.2@3323,2576 3323,2483 L9_1.1@3325,2481 C45_1.2@3392,2481
  Mid-Layer 1 w10: v1(1500,2280) v1(1845,2280) ; v1(2340.83,2383) 2364.83,2407 2655,2407 2783,2535 v1(3322,2535)
  Mid-Layer 2 w18: J1.17@605.5,2232.38 639.88,2198 1326,2198 1333,2205 1420,2205 1488,2273 1493,2273 v1(1500,2280)
CH1_CRYO.SQUID_SENSE_P: J1.35 R51_1.2 R72_1.2 U2_1.3 | length 1518.1
  Top Layer w10: v1(1520,2400) 1520,2407.5 U2_1.3@1552.5,2440 ; v1(1595,2249) 1604,2240 R51_1.2@1630,2240 1675,2240 R72_1.2@1700,2215
  Mid-Layer 2 w18: J1.35@493.69,2178.01 497.69,2174 1291,2174 1326,2139 1361,2139 1403,2181 1429.94,2181 1497.94,2249 1503.87,2249 1504.37,2249.5 1529.63,2249.5 1530.13,2249 v1(1595,2249) 1520,2324 v1(1520,2400)
CH1_MEZZ.BIAS_N: J2.18 L2_1.4 R4_1.2 | length 254.7
  Top Layer w10: L2_1.4@4867,2200 4880,2200 4940,2260 4981.62,2260 J2.18@5063.08,2341.46
CH1_MEZZ.BIAS_P: J2.37 L2_1.6 R4_1.1 | length 352
  Top Layer w10: L2_1.6@4867,2400 4867,2393 4910,2350 4970,2350 5015.91,2395.91 J2.37@5174.72,2395.91 ; J2.37@5174.89,2395.75 J2.37@5174.72,2395.91 ; J2.37@5174.89,2395.91 J2.37@5174.72,2395.91
CH1_MEZZ.NULLER_N: J2.17 L11_1.4 R35_1.2 R39_1.1 | length 565.9
  Top Layer w10: L11_1.4@4865,2495 v1(4910,2495) 4940,2525 R35_1.2@4940,2546
  Bottom Layer w10: R39_1.1@4790,2485 4797,2492 4907,2492 v1(4910,2495) 4976,2429 4976,2306.72 5049.92,2232.8 J2.17@5063.08,2232.8
CH1_MEZZ.NULLER_P: J2.36 L11_1.6 R11_1.1 R35_1.1 | length 836.4
  Top Layer w10: L11_1.6@4865,2695 4866,2694 v1(4909,2694) 4940,2663 R35_1.1@4940,2646
  Bottom Layer w10: R11_1.1@4790,2710 4893,2710 v1(4909,2694) 4996,2607 4996,2315 5023.91,2287.09 J2.36@5174.89,2287.09
CH1_MEZZ.SQUID_OUT_N: J2.16 R55_1.2 | length 3293.8
  Top Layer w10: R55_1.2@2235,2480 2255,2500 v1(2280,2500)
  Mid-Layer 1 w10: v1(2280,2500) 2312.5,2467.5 2492.87,2467.5 2646.37,2621 3535.63,2621 3671.63,2485 3837.37,2485 3952.37,2600 4343.28,2600 4429.28,2514 4535.28,2514 4594.28,2455 4821,2455 4997,2279 4997,2143.63 5016.49,2124.13 J2.16@5063.08,2124.13
CH1_MEZZ.SQUID_OUT_P: J2.35 R57_1.2 | length 3481
  Top Layer w10: R57_1.2@2235,2390 2260,2415 v1(2280,2415)
  Mid-Layer 1 w10: v1(2280,2415) 2312.5,2447.5 2495.5,2447.5 2653,2605 3529,2605 3665,2469 3844,2469 3959,2584 4336.66,2584 4422.66,2498 4528.66,2498 4587.66,2439 4814.37,2439 4981,2272.37 4981,2137 5039,2079 5107,2079 5174.89,2146.89 J2.35@5174.89,2178.43
CH2_CRYO.BOLO_N: J1.31 R5_2.1 | length 619.7
  Top Layer w10: v1(1005,1660) R5_2.1@1046,1660
  Mid-Layer 1 w10: J1.31@493.69,1743.36 J1.31@503.32,1753 ; J1.31@493.69,1753 938,1753 1005,1686 v1(1005,1660)
CH2_CRYO.BOLO_P: J1.13 R1_2.1 | length 469.4
  Top Layer w10: v1(1005,1740) R1_2.1@1051,1740
  Mid-Layer 1 w10: J1.13@605.5,1797.73 634.23,1769 944.63,1769 973.63,1740 v1(1005,1740)
CH2_CRYO.HEATER_P: J1.33 R7_2.1 | length 732.4
  Top Layer w10: J1.33@493.69,1960.69 775.31,1960.69 880,1856 v1(880,1815)
  Bottom Layer w10: v1(880,1815) 925,1815 960,1780 1047.5,1780 1071,1803.5 R7_2.1@1071,1850
CH2_CRYO.SQUID_BIAS_N: J1.29 R82_2.1 | length 977.2
  Top Layer w10: v1(1347,1619) 1387,1619 R82_2.1@1392,1624
  Mid-Layer 1 w10: J1.29@493.69,1526.04 493.69,1553.11 565.57,1625 630.57,1625 659.57,1596 1321,1596 v1@1345,1620
CH2_CRYO.SQUID_BIAS_P: J1.11 R81_2.2 | length 806.2
  Top Layer w10: v1(1345,1549) 1382,1549 R81_2.2@1392,1559
  Mid-Layer 1 w10: J1.11@605.5,1580 1319,1580 v1@1343,1556 ; J1.11@605.5,1580.41 J1.11@605.91,1580 ; v1@1340,1544 v1(1345,1549)
CH2_CRYO.SQUID_COIL_N: J1.32 R36_2.2 R48_2.1 | length 686.8
  Top Layer w10: v1(998,1865) 1031,1865 1051,1885 1051,1875 R48_2.1@1111,1815
  Mid-Layer 1 w10: J1.32@493.69,1852.02 J1.32@502.66,1861 ; J1.32@493.69,1861 994,1861 v1(998,1865) v1@1010,1865
CH2_CRYO.SQUID_COIL_P: J1.14 R19_2.2 R28_2.1 R38_2.2 | length 1101.3
  Top Layer w10: v1@1010,1990 1018,1998 1051,1998 ; R19_2.2@1051,1955 R19_2.2@1051,1957 1051,1998 ; R38_2.2@1051,2025 1051,1998 ; R28_2.1@1564,2009 1239,2009 1228,1998 1051,1998
  Mid-Layer 1 w10: J1.14@605.5,1906.39 634.89,1877 897,1877 1005,1985 v1(1005,1998)
CH2_CRYO.SQUID_SENSE_N: C8_2.2 C9_2.2 C45_2.2 C60_2.2 J1.12 L9_2.1 R30_2.1 R52_2.1 R53_2.2 R56_2.2 R82_2.2 | length 3705.6
  Top Layer w10: R53_2.2@1422,1748 1422,1679 1452,1649 R82_2.2@1452,1624 1467,1624 v1(1502,1659) ; 1422,1767 C9_2.2@1422,1817 C8_2.2@1422,1887 R30_2.1@1422,1954 ; R56_2.2@1777,1604 1827,1604 R52_2.1@1847,1624 ; v1(1847,1659) R52_2.1@1847,1624 ; v1(2337,1712) 2337,1649.67 2269.33,1582 1863,1582 1847,1598 R52_2.1@1847,1624 ; C60_2.2@3325,1955 v1(3325,1912) 3325,1862 L9_2.1@3327,1860 C45_2.2@3394,1860
  Mid-Layer 1 w10: v1(1502,1659) v1(1847,1659) ; v1(2337,1712) 2337,1777 2364,1804 2648,1804 2756,1912 v1(3325,1912)
  Mid-Layer 2 w18: J1.12@605.5,1689.07 605.5,1677.08 623.87,1658.7 849.24,1658.7 901.94,1606 1270.94,1606 1291.94,1585 ; 1295,1584 1422,1584 1490,1652 1495,1652 v1(1502,1659)
CH2_CRYO.SQUID_SENSE_P: J1.30 R51_2.2 R72_2.2 U2_2.3 | length 1589.2
  Top Layer w10: v1(1522,1779) 1522,1786.5 U2_2.3@1554.5,1819 ; v1(1597,1628) 1606,1619 R51_2.2@1632,1619 1677,1619 R72_2.2@1702,1594
  Mid-Layer 2 w18: J1.30@493.69,1634.7 839.3,1634.7 893,1581 1262,1581 1325,1518 1365,1518 ; 1328,1518 1363,1518 1405,1560 1431.94,1560 1499.94,1628 1505.87,1628 1506.37,1628.5 1531.63,1628.5 1532.13,1628 v1(1597,1628) 1522,1703 v1(1522,1779)
CH2_MEZZ.BIAS_N: J2.15 L2_2.4 R4_2.2 | length 1048.4
  Top Layer w10: L2_2.4@4867,1580 4880,1580 4940,1640 4941.22,1641.22 5097.22,1641.22 5144,1688 5199,1688 5249,1738 5249,2078 5205,2122 5148,2122 5063.08,2037.08 J2.15@5063.08,2015.47
CH2_MEZZ.BIAS_P: J2.34 L2_2.6 R4_2.1 | length 691.8
  Top Layer w10: L2_2.6@4867,1780 4867,1773 4910,1730 4970,1730 4977.76,1737.76 5086.76,1737.76 5146,1797 5204,1797 5225,1818 5225,2019.65 J2.34@5174.89,2069.76
CH2_MEZZ.NULLER_N: J2.14 L11_2.4 R35_2.2 R39_2.1 | length 393.5
  Top Layer w10: L11_2.4@4865,1875 v1(4910,1875) 4940,1905 4940,1929 4950,1929 4981,1960 5009.89,1960 J2.14@5063.08,1906.81
  Bottom Layer w10: R39_2.1@4790,1865 4900,1865 v1(4910,1875)
CH2_MEZZ.NULLER_P: J2.33 L11_2.6 R11_2.1 R35_2.1 | length 502.6
  Top Layer w10: L11_2.6@4865,2075 4866,2074 v1(4909,2074) 4940,2043 4940,2009 4952,2009 4981,1980 5019,1980 5037.9,1961.1 J2.33@5174.89,1961.1
  Bottom Layer w10: R11_2.1@4790,2090 4893,2090 v1(4909,2074)
CH2_MEZZ.SQUID_OUT_N: J2.13 R55_2.2 | length 3074.2
  Top Layer w10: R55_2.2@2233.87,1861.5 2253.87,1881.5 v1(2278.87,1881.5)
  Mid-Layer 1 w10: v1(2278.87,1881.5) 2311.37,1849 2504,1849 2656,2001 3539.63,2001 3682.63,1858 3827.87,1858 3919.87,1950 4203,1950 4269,1884 4604.28,1884 4648.28,1840 5010,1840 5051.85,1798.15 J2.13@5063.08,1798.15
CH2_MEZZ.SQUID_OUT_P: J2.32 R57_2.2 | length 3277
  Top Layer w10: R57_2.2@2233.87,1771.5 2258.87,1796.5 v1(2278.87,1796.5)
  Mid-Layer 1 w10: v1(2278.87,1796.5) 2311.37,1829 2506.63,1829 2662.63,1985 3533,1985 3676,1842 3834.5,1842 3926.5,1934 4196.37,1934 4262.37,1868 4597.66,1868 4641.66,1824 5003.37,1824 5014,1813.37 5014,1780 5044,1750 5093,1750 5174.89,1831.89 J2.32@5174.89,1852.44
CH3_CRYO.BOLO_N: J1.27 R5_3.1 | length 676.3
  Top Layer w10: v1(1005,1035) R5_3.1@1046,1035
  Mid-Layer 1 w10: J1.27@493.69,1308.72 502.97,1318 727,1318 1005,1040 v1(1005,1035)
CH3_CRYO.BOLO_P: J1.9 R1_3.1 | length 548.3
  Top Layer w10: v1(1005,1115) R1_3.1@1051,1115
  Mid-Layer 1 w10: J1.9@605.5,1363.09 634.58,1334 733.63,1334 952.63,1115 v1(1005,1115)
CH3_CRYO.HEATER_P: J1.6 R7_3.1 | length 733.3
  Top Layer w10: J1.6@605.5,1037.1 649.47,1037.1 741.57,945 v1(865,945)
  Bottom Layer w10: v1(865,945) 985,945 1071,1031 R7_3.1@1071,1225
CH3_CRYO.SQUID_BIAS_N: J1.25 R82_3.1 | length 1069.7
  Top Layer w10: v1@1355,995 v1(1355,1000) 1370,1015 R82_3.1@1397,1015
  Mid-Layer 1 w10: J1.25@493.69,1091.39 493.69,1109.11 578.57,1194 638.2,1194 736.63,1194 959.63,971 1326,971 1350,995 v1@1355,995
CH3_CRYO.SQUID_BIAS_P: J1.7 R81_3.2 | length 885
  Top Layer w10: v1(1355,935) 1370,950 R81_3.2@1397,950
  Mid-Layer 1 w10: J1.7@605.5,1145.76 663.81,1145.76 762.24,1145.76 953,955 1330,955 1350,935 v1(1355,935)
CH3_CRYO.SQUID_COIL_N: J1.28 R36_3.2 R48_3.1 | length 745.9
  Top Layer w10: v1(1001,1240) 1031,1240 1051,1260 R36_3.2@1051,1257 1051,1250 R48_3.1@1111,1190
  Mid-Layer 1 w10: J1.28@493.69,1417.38 497.31,1421 825,1421 1006,1240 v1@1010,1240
CH3_CRYO.SQUID_COIL_P: J1.10 R19_3.2 R28_3.1 R38_3.2 | length 1129.8
  Top Layer w10: v1(1001,1365) 1051,1365 ; R19_3.2@1051,1330 R19_3.2@1051,1332 1051,1365 ; R38_3.2@1051,1400 1051,1365 ; R28_3.1@1569,1400 1235,1400 1200,1365 1051,1365
  Mid-Layer 1 w10: J1.10@605.5,1471.75 640.24,1437 831.63,1437 942.63,1326 971,1326 1001,1356 v1(1001,1365)
CH3_CRYO.SQUID_SENSE_N: C8_3.2 C9_3.2 C45_3.2 C60_3.2 J1.8 L9_3.1 R30_3.1 R52_3.1 R53_3.2 R56_3.2 R82_3.2 | length 3786.3
  Top Layer w10: R53_3.2@1427,1139 1427,1070 1457,1040 R82_3.2@1457,1015 1472,1015 v1(1507,1050) ; 1427,1158 C9_3.2@1427,1208 C8_3.2@1427,1278 R30_3.1@1427,1345 ; R56_3.2@1782,995 1832,995 R52_3.1@1852,1015 ; v1(1852,1050) R52_3.1@1852,1015 ; v1@2333,1154 2333,1024 2282,973 1868,973 1852,989 R52_3.1@1852,1015 ; C60_3.2@3330,1346 3330,1253 L9_3.1@3332,1251 C45_3.2@3399,1251
  Mid-Layer 1 w10: v1(1507,1050) v1(1852,1050) ; v1(2335.5,1151.5) 2362,1178 2617,1178 2738.5,1299.5 v1(3330.5,1299.5)
  Mid-Layer 2 w18: J1.8@605.5,1254.43 703.92,1254.43 992.84,965.51 1033.96,965.51 1421.57,965.51 1499.06,1043 1500,1043 v1(1507,1050)
CH3_CRYO.SQUID_SENSE_P: J1.26 R51_3.2 R72_3.2 U2_3.3 | length 1636.5
  Top Layer w10: v1(1527,1170) 1527,1177.5 U2_3.3@1559.5,1210 ; v1(1602,1019) 1611,1010 R51_3.2@1637,1010 1682,1010 R72_3.2@1707,985
  Mid-Layer 2 w18: J1.26@493.69,1200.06 723.94,1200.06 984,940 1300,940 1340,900 1370,900 1395,925 1415,925 1509,1019 v1(1602,1019) 1527,1094 v1(1527,1170)
CH3_MEZZ.BIAS_N: J2.11 L2_3.4 R4_3.2 | length 797.3
  Top Layer w10: L2_3.4@4867,955 L2_3.4@4880,955 ; v1(4911,954) 4910,955 L2_3.4@4880,955 ; R4_3.2@4947,1000 4925,1000 L2_3.4@4880,955
  Bottom Layer w10: v1(4911,954) 5004,1047 5004,1521.75 J2.11@5047.13,1564.87
CH3_MEZZ.BIAS_P: J2.30 L2_3.6 R4_3.1 | length 823.6
  Top Layer w10: v1(4909,1155) 4867,1155 4867,1148 4910,1105 R4_3.1@4947,1105
  Bottom Layer w10: v1(4909,1155) 4984,1230 4984,1592 5024.5,1632.5 5172.27,1632.5 J2.30@5174.89,1635.12
CH3_MEZZ.NULLER_N: J2.10 L11_3.4 R35_3.2 R39_3.1 | length 484.4
  Top Layer w10: L11_3.4@4865,1250 v1(4910,1250) 4940,1280 4940,1295.83 4945.83,1295.83 4990,1340 4990,1444 5018.17,1472.17 J2.10@5063.08,1472.17
  Bottom Layer w10: R39_3.1@4790,1240 4900,1240 v1(4910,1250)
CH3_MEZZ.NULLER_P: J2.29 L11_3.6 R11_3.1 R35_3.1 | length 530.2
  Top Layer w10: L11_3.6@4865,1450 4866,1449 v1(4909,1449) 4940,1418 ; R35_3.1@4940,1395 4940,1418 ; J2.29@5174.89,1526.46 5025.46,1526.46 4940,1441 4940,1418
  Bottom Layer w10: R11_3.1@4790,1465 4893,1465 v1(4909,1449)
CH3_MEZZ.SQUID_OUT_N: J2.9 R55_3.2 | length 3159.5
  Top Layer w10: R55_3.2@2233.87,1236.5 2253.87,1256.5 v1(2278.87,1256.5)
  Mid-Layer 1 w10: v1(2278.87,1256.5) 2311.37,1224 2501.37,1224 2669.37,1392 3534.63,1392 3696.31,1230.31 3803.69,1230.31 3924.37,1351 4347.93,1351 4434.93,1264 4541.63,1264 4595.63,1210 4773.37,1210 4894.37,1331 5030.57,1331 J2.9@5063.08,1363.5
CH3_MEZZ.SQUID_OUT_P: J2.28 R57_3.2 | length 3309.4
  Top Layer w10: R57_3.2@2233.87,1146.5 2258.87,1171.5 v1(2278.87,1171.5)
  Mid-Layer 1 w10: v1(2278.87,1171.5) 2315.37,1208 2508,1208 2676,1376 3528,1376 3689.69,1214.31 3810.31,1214.31 3931,1335 4341.3,1335 4428.3,1248 4535,1248 4589,1194 4780,1194 4901,1315 5081,1315 5174.89,1408.89 J2.28@5174.89,1417.8
CH4_CRYO.BOLO_N: J1.22 R5_4.1 | length 743.9
  Top Layer w10: v1(1005,415) R5_4.1@1046,415
  Mid-Layer 1 w10: J1.22@493.69,765.41 501.28,773 617.07,773 715.49,773 976,512.49 976,444 v1(1005,415)
CH4_CRYO.BOLO_P: J1.4 R1_4.1 | length 599.1
  Top Layer w10: v1(1005,495) R1_4.1@1051,495
  Mid-Layer 1 w10: J1.4@605.5,807.2 J1.4@605.5,819.78 691.34,819.78 1005,506.12 v1(1005,495)
CH4_CRYO.HEATER_P: J1.24 R7_4.1 | length 1121.4
  Top Layer w10: J1.24@493.69,982.73 643.84,982.73 756.57,870 v1(875,870) 855,870
  Bottom Layer w10: v1(875,870) 925,820 925,505 975,455 1021.5,455 1071,504.5 R7_4.1@1071,605
CH4_CRYO.SQUID_BIAS_N: J1.20 R82_4.1 | length 1111.3
  Top Layer w10: v1(1350,375) 1395,420 R82_4.1@1399,420
  Mid-Layer 1 w10: J1.20@493.69,548.09 493.69,561.11 582.57,650 625.57,650 689.63,650 989.63,350 1330,350 1350,370 v1(1350,375)
CH4_CRYO.SQUID_BIAS_P: J1.2 R81_4.2 | length 930.8
  Top Layer w10: v1@1359,315 R81_4.2@1399,355
  Mid-Layer 1 w10: J1.2@616.12,602.46 J1.2@605.5,602.46 714.54,602.46 983,334 1326,334 1345,315 v1@1350,315
  other v1: 1350,305
CH4_CRYO.SQUID_COIL_N: J1.23 R36_4.2 R48_4.1 | length 793.9
  Top Layer w10: v1(999,620) 1031,620 1051,640 R36_4.2@1051,637 1051,630 R48_4.1@1111,570
  Mid-Layer 1 w10: v1(999,620) 994,620 970,644 970,692 955,707 953.37,707 786.37,874 J1.23@493.76,874 ; J1.23@493.76,874 J1.23@493.69,874.07 J1.23@493.76,874
CH4_CRYO.SQUID_COIL_P: J1.5 R19_4.2 R28_4.1 R38_4.2 | length 1161.4
  Top Layer w10: v1(999,745) 1051,745 ; R19_4.2@1051,710 R19_4.2@1051,712 1051,745 ; R38_4.2@1051,780 1051,745 ; R28_4.1@1571,805 1270,805 1210,745 1051,745
  Mid-Layer 1 w10: J1.5@605.5,928.44 643.94,890 793,890 960,723 988,723 1000,735 v1@1000,745
CH4_CRYO.SQUID_SENSE_N: C8_4.2 C9_4.2 C45_4.2 C60_4.2 J1.3 L9_4.1 R30_4.1 R52_4.1 R53_4.2 R56_4.2 R82_4.2 | length 3832
  Top Layer w10: R53_4.2@1429,544 1429,475 1459,445 R82_4.2@1459,420 1474,420 v1(1509,455) ; 1429,563 C9_4.2@1429,613 C8_4.2@1429,683 R30_4.1@1429,750 ; R56_4.2@1784,400 1834,400 R52_4.1@1854,420 ; v1(1854,455) R52_4.1@1854,420 ; v1(2334,532) 2334,405 2307,378 1870,378 1854,394 R52_4.1@1854,420 ; C60_4.2@3330,755 3330,662 L9_4.1@3332,660 C45_4.2@3399,660
  Mid-Layer 1 w10: v1(1509,455) v1(1854,455) ; v1(2334,532) 2359,557 2604,557 2668.5,621.5 3244,621.5 v1(3329,706.5)
  Mid-Layer 2 w18: J1.3@605.5,711.12 744.57,572.04 744.57,571.94 976.52,340 1389,340 1497,448 1502,448 v1(1509,455)
CH4_CRYO.SQUID_SENSE_P: J1.21 R51_4.2 R72_4.2 U2_4.3 | length 1692.4
  Top Layer w10: v1(1529,575) 1529,582.5 U2_4.3@1561.5,615 ; v1(1604,424) 1613,415 R51_4.2@1639,415 1684,415 R72_4.2@1709,390
  Mid-Layer 2 w18: J1.21@493.69,656.75 625.83,656.75 966.57,316 1289,316 1335,270 1358.13,270 1380.5,292.37 1380.5,297.56 1506.94,424 1512.87,424 1513.37,424.5 1538.63,424.5 1539.13,424 v1(1604,424) 1529,499 v1(1529,575)
CH4_MEZZ.BIAS_N: J2.8 L2_4.4 R4_4.2 | length 1670
  Top Layer w10: v1(4910,333) 4869,333 4867,335 4880,335 R4_4.2@4940,395 ; J2.8@5063.08,1254.84 5063.08,1281.08 5139.4,1357.4 5194.88,1357.4 5253,1299.28 5253,485 v1(5250,482)
  Mid-Layer 1 w10: v1(4910,333) 4910,395 4935.57,420.57 5187.2,420.57 5193.63,427 5194.71,427 v1@5249.86,482.14
CH4_MEZZ.BIAS_P: J2.27 L2_4.6 R4_4.1 | length 1419.9
  Top Layer w10: v1(4911,537) 4869,537 4867,535 4867,528 4905,490 R4_4.1@4947,490 ; J2.27@5174.89,1309.13 5233,1251.02 5233,520 v1(5195,482)
  Mid-Layer 1 w10: v1(4911,537) 4911,464 4938.43,436.57 5180.57,436.57 5195,451 v1(5195,482)
CH4_MEZZ.NULLER_N: J2.7 L11_4.4 R35_4.2 R39_4.1 | length 758.1
  Top Layer w10: L11_4.4@4865,630 v1(4910,630) 4940,660 4940,695 4956,695 4996,735 4996,811.37 5011,826.37 5011,1094.1 J2.7@5063.08,1146.18
  Bottom Layer w10: R39_4.1@4790,620 4900,620 v1(4910,630)
CH4_MEZZ.NULLER_P: J2.26 L11_4.6 R11_4.1 R35_4.1 | length 806
  Top Layer w10: L11_4.6@4865,830 4866,829 v1(4909,829) R35_4.1@4940,798 ; R35_4.1@4947,785 4995,833 4995,1161 5034.47,1200.47 J2.26@5174.89,1200.47
  Bottom Layer w10: R11_4.1@4790,845 4893,845 v1(4909,829)
CH4_MEZZ.SQUID_OUT_N: J2.6 R55_4.2 | length 3412.4
  Top Layer w10: R55_4.2@2235.69,637.5 2255.69,657.5 v1(2280.69,657.5)
  Mid-Layer 1 w10: v1(2280.69,657.5) 2318.19,620 2475.37,620 2629.37,774 3493.63,774 3658.31,609.31 3829.69,609.31 3885.37,665 4413.28,665 4438.28,640 4535,640 4581,594 4949,594 4986,631 4986,960.44 J2.6@5063.08,1037.52
CH4_MEZZ.SQUID_OUT_P: J2.25 R57_4.2 | length 3566.3
  Top Layer w10: R57_4.2@2235.69,547.5 2260.69,572.5 v1(2280.69,572.5)
  Mid-Layer 1 w10: v1(2280.69,572.5) 2312.19,604 2482,604 2636,758 3487,758 3651.69,593.31 3836.31,593.31 3892,649 4406.66,649 4431.66,624 4528.37,624 4574.37,578 4955.63,578 5002,624.37 5002,953.81 5035.19,987 5093,987 5174.89,1068.89 J2.25@5174.89,1091.81
DAC_VREF_1: C11_1.1 C12_1.1 C14_1.2 C16_1.2 C67_1.2 C68_1.2 C69_1.2 L1_1.1 R25_1.2 U3_1.1 U3_1.2 U4_1.1 U4_1.2 U6_1.1 U6_1.2 | length 1388.7
  Top Layer w10: v1@3675.5,2168.5 v1(3678,2166) ; 3675.5,2234 3681,2234 C68_1.2@3713,2266 ; v1(3675.5,2372) 3691.5,2356 C69_1.2@3713,2356
  Top Layer w20: L1_1.1@3327,2157 C16_1.2@3395,2157 3460.5,2157 v1(3675.5,2372) ; v1@3675.5,2168.5 3675.5,2234 v1(3675.5,2372) ; v1@3675.5,2568.5 v1(3675.5,2372)
  Bottom Layer w10: R25_1.2@3560.5,2178 3564.5,2174 3619.5,2174 U3_1.1@3621.5,2172 ; U6_1.2@3619.5,2404 U6_1.1@3619.5,2379 3661.5,2379 3675.5,2365 3675.5,2318 C14_1.2@3679.5,2314 ; U3_1.2@3621.5,2197 U3_1.1@3621.5,2172 ; U4_1.2@3622.5,2612 U4_1.1@3622.5,2587 3656.5,2587 3675.5,2568 3675.5,2529 C12_1.1@3682.5,2522 ; 3663.5,2172 U3_1.1@3621.5,2172 ; C11_1.1@3679.5,2108 v1@3679.5,2156
  other v1: 3675,2568.5
DAC_VREF_2: C11_2.1 C12_2.1 C14_2.2 C16_2.2 C67_2.2 C68_2.2 C69_2.2 L1_2.1 R25_2.2 U3_2.1 U3_2.2 U4_2.1 U4_2.2 U6_2.1 U6_2.2 | length 1413.3
  Top Layer w10: 3678,1606 3711,1639 C68_2.2@3716,1639 ; v1@3678,1737.5 3690.5,1725 C69_2.2@3716,1725 ; v1@3678,1935 v1@3682,1939
  Top Layer w20: L1_2.1@3329,1536 C16_2.2@3397,1536 3476,1536 v1(3677.5,1737.5) ; v1(3678,1527) 3678,1606 3678,1737.5 v1@3678,1935
  Bottom Layer w10: R25_2.2@3560.5,1553 3564.5,1549 3619.5,1549 U3_2.1@3621.5,1547 ; U6_2.2@3619.5,1779 U6_2.1@3619.5,1754 3661.5,1754 v1@3677.75,1737.75 ; U3_2.2@3621.5,1572 U3_2.1@3621.5,1547 ; U4_2.2@3622.5,1987 U4_2.1@3622.5,1962 3656.5,1962 v1(3679.5,1939) v1@3682.5,1936 ; C12_2.1@3678,1896 v1@3678,1935 ; C11_2.1@3679.5,1483 3679.5,1531 3663.5,1547 U3_2.1@3621.5,1547 ; C14_2.2@3679.5,1689 v1@3679.5,1736
DAC_VREF_3: C11_3.1 C12_3.1 C14_3.2 C16_3.2 C67_3.2 C68_3.2 C69_3.2 L1_3.1 R25_3.2 U3_3.1 U3_3.2 U4_3.1 U4_3.2 U6_3.1 U6_3.2 | length 1390.9
  Top Layer w10: 3678.5,981.5 C68_3.2@3717,1020 ; v1@3678.5,1317 v1(3679.5,1318) ; v1@3684,1108 C69_3.2@3717,1108
  Top Layer w20: L1_3.1@3334,927 C16_3.2@3402,927 3492,927 v1@3678,1113 ; v1(3678.5,909.5) 3678.5,981.5 v1@3678.5,1317
  Bottom Layer w10: R25_3.2@3560.5,932 3564.5,928 3619.5,928 U3_3.1@3621.5,926 ; U6_3.2@3619.5,1158 U6_3.1@3619.5,1133 3661.5,1133 v1@3679.25,1115.25 ; U3_3.2@3621.5,951 U3_3.1@3621.5,926 ; U4_3.2@3622.5,1366 U4_3.1@3622.5,1341 3656.5,1341 v1(3679.5,1318) 3679.5,1279 C12_3.1@3682.5,1276 ; C11_3.1@3679.5,862 3679.5,910 3663.5,926 U3_3.1@3621.5,926 ; C14_3.2@3679.5,1068 v1@3679.5,1113.5
  other v1: 3677.5,1113.5
DAC_VREF_4: C11_4.1 C12_4.1 C14_4.2 C16_4.2 C67_4.2 C68_4.2 C69_4.2 L1_4.1 R25_4.2 U3_4.1 U3_4.2 U4_4.1 U4_4.2 U6_4.1 U6_4.2 | length 1390
  Top Layer w10: 3678.5,355.5 C68_4.2@3717,394 ; v1(3678.5,493.5) 3694,478 C69_4.2@3717,478
  Top Layer w20: L1_4.1@3334,336 C16_4.2@3402,336 3521,336 v1(3678.5,493.5) ; v1(3678.5,288.5) 3678.5,355.5 v1(3678.5,493.5) ; v1(3678.5,696.5) v1(3678.5,493.5)
  Bottom Layer w10: R25_4.2@3560.5,308 3564.5,304 3619.5,304 U3_4.1@3621.5,302 ; U6_4.2@3619.5,534 U6_4.1@3619.5,509 3661.5,509 v1@3677.75,492.75 ; U3_4.2@3621.5,327 U3_4.1@3621.5,302 ; U4_4.2@3622.5,742 U4_4.1@3622.5,717 3656.5,717 3679.5,694 3679.5,655 C12_4.1@3682.5,652 ; C11_4.1@3679.5,238 3679.5,286 3663.5,302 U3_4.1@3621.5,302 ; C14_4.2@3679.5,444 v1@3679.5,491
ENCH1.DISCHARGE: R34_1.1 U9.26 | length 3446.9
  Bottom Layer w10: R34_1.1@1840,2765 1902.52,2765 1924.02,2786.5 2098.5,2786.5 2195,2690 2435,2690 2660,2915 4392.88,2915 4569,2738.88 4569,2419 4477.24,2327.24 U9.26@4424.06,2327.24
ENCH1.ENFEEDBACK: R33_1.2 R74_1.1 U9.25 | length 3502.5
  Bottom Layer w10: R74_1.1@1875,2345 1890,2345 1912.39,2367.39 1912.39,2404.86 1956.5,2448.98 1956.5,2533.5 R33_1.2@1955,2535 2450,2535 2805,2890 4395.25,2890 4553,2732.25 4553,2433 4478.74,2358.74 U9.25@4424.06,2358.74
ENCH1.ENFLUXBIAS: U4_1.5 U9.18 | length 315.4
  Bottom Layer w10: U4_1.5@3807.5,2662 3838,2662 3870,2630 3870,2603.5 3925.78,2547.72 U9.18@4060,2547.72
ENCH1.ENOFFSET: U6_1.5 U9.17 | length 277.2
  Bottom Layer w10: U6_1.5@3804.5,2454 3859,2454 3921.22,2516.22 U9.17@4055.94,2516.22
ENCH1.ENSQUIDBIAS: U3_1.5 U9.16 | length 365.2
  Bottom Layer w10: U3_1.5@3806.5,2247 3806.5,2276.5 4014.72,2484.72 U9.16@4055.94,2484.72
ENCH2.DISCHARGE: R34_2.1 U9.24 | length 3464.3
  Bottom Layer w10: R34_2.1@1845,2145 2165,2145 2890,2870 4392.63,2870 4537,2725.63 4537,2452 4475.24,2390.24 U9.24@4424.06,2390.24
ENCH2.ENFEEDBACK: R33_2.2 R74_2.1 U9.23 | length 3739.7
  Bottom Layer w10: R74_2.1@1877,1724 1892,1724 1914.39,1746.39 1914.39,1783.86 1958.5,1827.98 R33_2.2@1958.5,1912.5 ; R33_2.2@1957,1914 2217,1914 2480,2177 2480,2410 2915,2845 4395,2845 4520,2720 4520,2460 4481.73,2421.73 U9.23@4424.06,2421.73
ENCH2.ENFLUXBIAS: U4_2.5 U9.15 | length 548.5
  Bottom Layer w10: U4_2.5@3807.5,2037 3807.5,2077.5 3837.5,2107.5 3837.5,2284.87 4005.86,2453.23 U9.15@4055.94,2453.23
ENCH2.ENOFFSET: U6_2.5 U9.14 | length 727.5
  Bottom Layer w10: U6_2.5@3804.5,1829 3804.5,1871.5 3853.5,1920.5 3853.5,2278.25 3996.99,2421.73 U9.14@4052,2421.73
ENCH2.ENSQUIDBIAS: U3_2.5 U9.13 | length 911.3
  Bottom Layer w10: U3_2.5@3806.5,1622 3806.5,1654.5 3837,1685 3837,1873.07 3869.5,1905.57 3869.5,2271.62 3988.12,2390.24 U9.13@4055.94,2390.24
ENCH3.DISCHARGE: R34_3.1 U9.22 | length 3805.6
  Bottom Layer w10: R34_3.1@1845,1535 2215,1535 2770,2090 2770,2525 3059,2814 4401,2814 4500,2715 4500,2475 4478.23,2453.23 U9.22@4424.06,2453.23